# Altium PCB STM32_BluePill.PcbDoc (part 1 of 2)
Units mm, origin at the board's own origin, x right, y up, seen from the top; angles counter-clockwise.
Board outline 53 x 23 mm, 2 copper layers (Top Layer, Bottom Layer), stack 1.569 mm thick; 35 components, 50 nets, 176 pads, 44 vias.
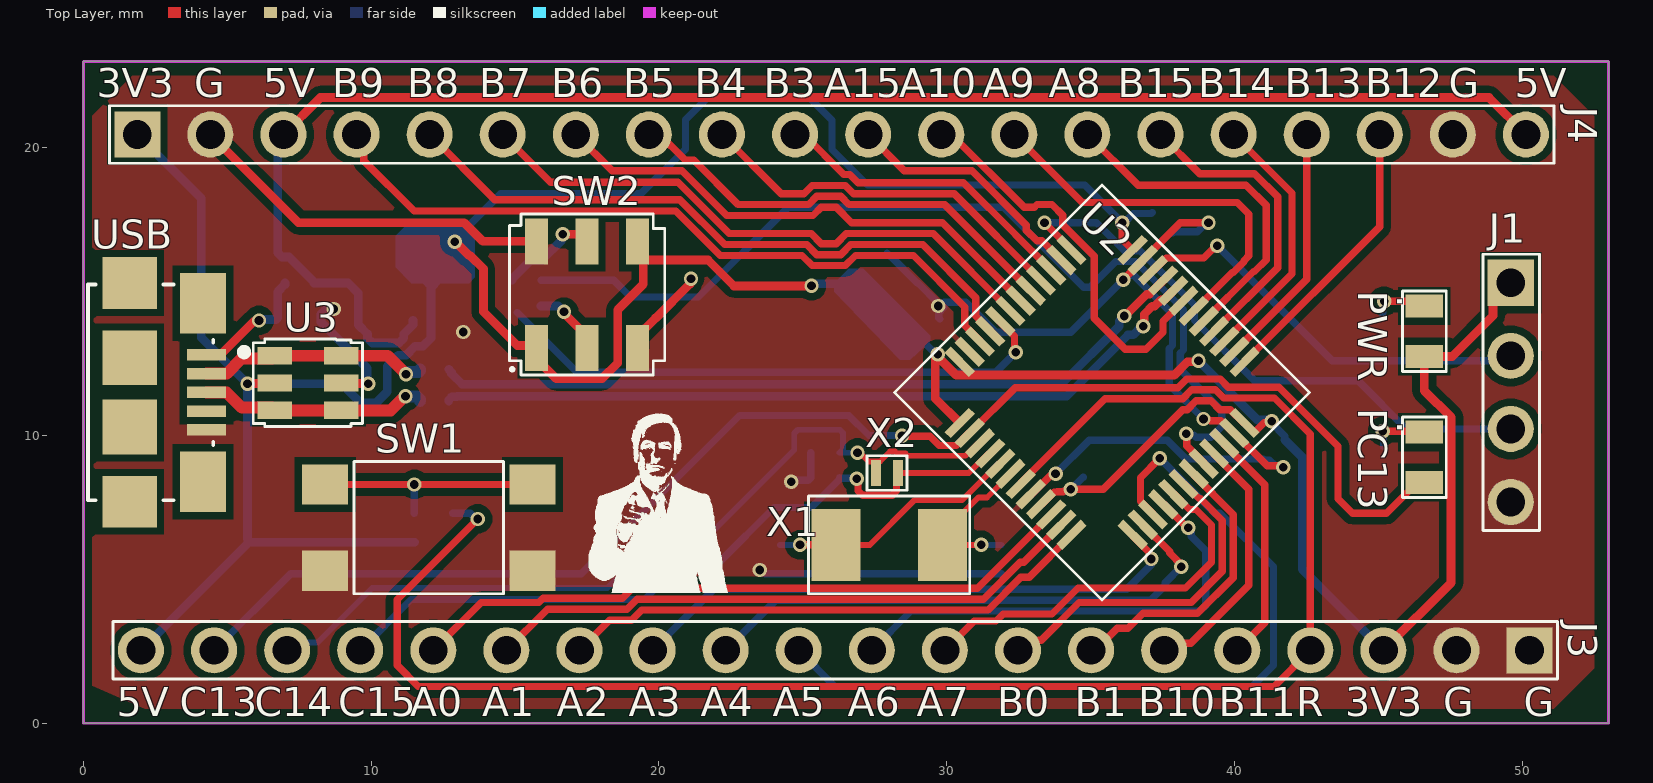
[diagram p0: Top Layer view]
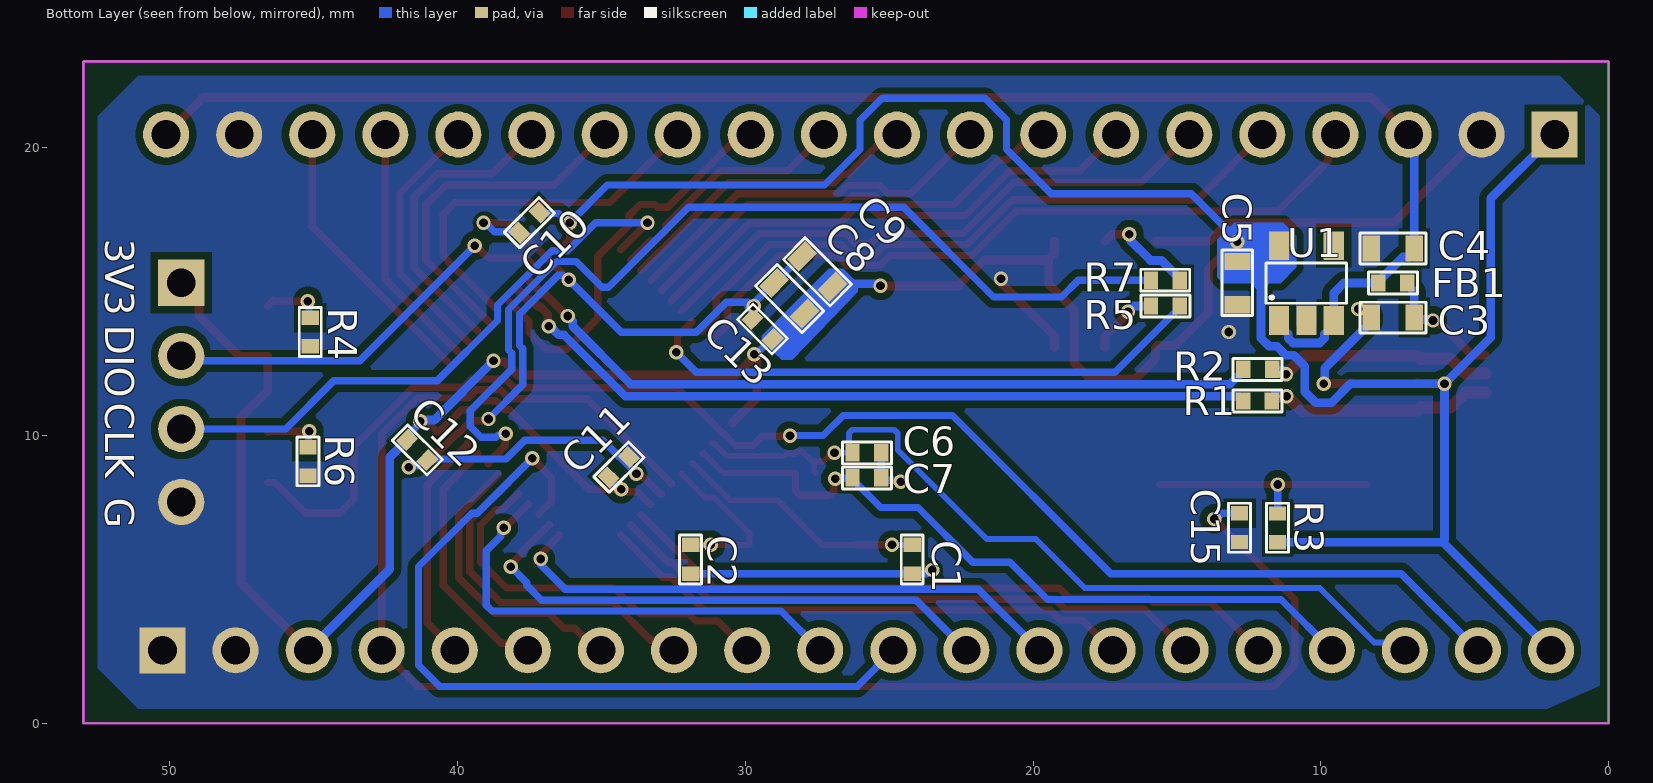
[diagram p1: Bottom Layer view, seen from below]
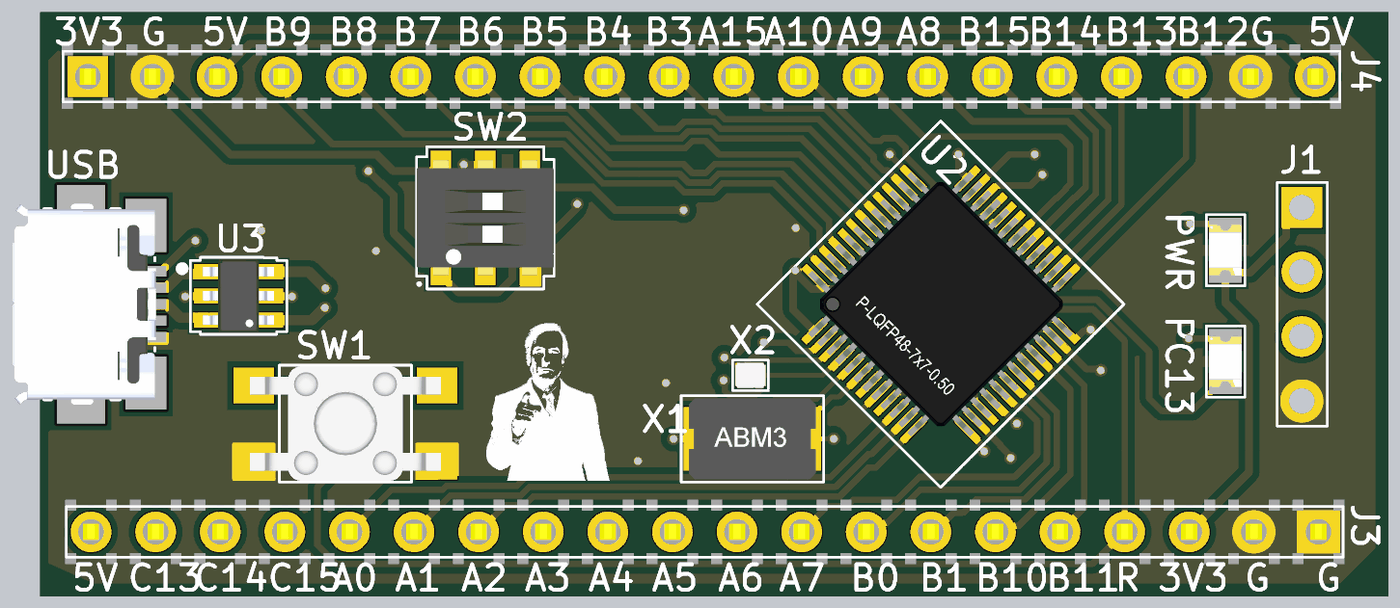
[diagram p2: 3D render of the assembled board from above, using the file's embedded part models]
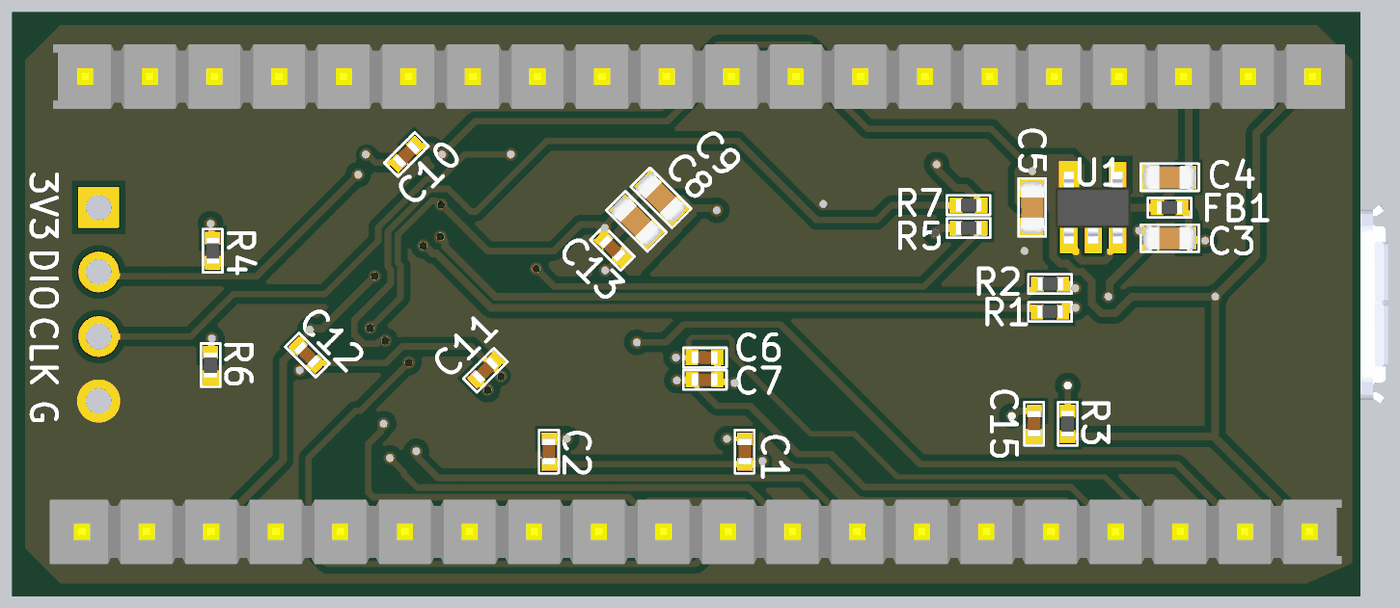
[diagram p3: 3D render of the assembled board from below, using the file's embedded part models]

## Layer stack, top to bottom
Top Solder: solder mask 0.0254, SM-001, Dk 4
Top Layer: signal copper 0.035
Dielectric 1: core 1.4986, Core-043, Dk 4.3
Bottom Layer: signal copper 0.035
Bottom Solder: solder mask 0.0254, SM-001, Dk 4

## Board outline
0,0 53,0 53,23 0,23

## Design rules (kind name [scope] priority, off if disabled: settings)
Clearance [All] p1: gap=0.254 ignorepadtopadclearanceinfootprint=FALSE except(0: Arc-Text Arc-Hole Track-Text Track-Hole SMDPad-Text SMDPad-Hole THPad-Text THPad-Hole Via-Text Via-Hole Fill-Text Fill-Hole Poly-Text Poly-Hole Region-Text Region-Hole Text-Text Text-Hole; 0.127: Arc-Arc Arc-Track Arc-SMDPad Track-Track Track-SMDPad SMDPad-SMDPad; 0.33: Arc-THPad Track-THPad SMDPad-THPad THPad-Via; 0.5: THPad-THPad)
DiffPairsRouting USB [InDifferentialPair('USB')] p1: maxlimit=0.152 minlimit=0.152 mostfreqgap=0.152 toplayer_minwidth=0.411 toplayer_maxwidth=0.411 toplayer_prefwidth=0.411 bottomlayer_minwidth=0.411 bottomlayer_maxwidth=0.411 bottomlayer_prefwidth=0.411 impedanceprofiledriven=TRUE impedanceprofileid={913DD1D4-14ED-41A0-9D1C-7E9C1710D32E} impedanceprofilevalue=90.000000 maxuncoupledlength=12.7
DiffPairsRouting MCU [InDifferentialPair('MCU')] p2: maxlimit=0.127 minlimit=0.127 mostfreqgap=0.127 toplayer_minwidth=0.3 toplayer_maxwidth=0.3 toplayer_prefwidth=0.3 bottomlayer_minwidth=0.3 bottomlayer_maxwidth=0.3 bottomlayer_prefwidth=0.3 impedanceprofiledriven=TRUE impedanceprofileid={99C51990-5D96-49DF-96CC-9B0603F21D91} impedanceprofilevalue=90.000000 maxuncoupledlength=12.7
HoleSize [All] p1: absolutevalues=TRUE maxlimit=6.3 minlimit=0.3 maxpercent=80.000 minpercent=20.000
PlaneConnect [All] p1: planeconnectstyle=Direct reliefexpansion=0.508 reliefentries=4 reliefconductorwidth=0.254 reliefairgap=0.254
PolygonConnect [All] p1: connectstyle=Direct reliefconductorwidth=0.254 reliefentries=4 polygonreliefangle="90 Angle" airgapwidth=0.254
RoutingCorners [All] p1: cornerstyle=45-Degree minsetback=1.27 maxsetback=1.27
RoutingVias [All] p1: holewidth=0.5 width=0.5 viastyle="Through Hole" minholewidth=0.3 minwidth=0.3 maxholewidth=2 maxwidth=2
SilkToSilkClearance [All] p1: silktosilkclearance=0.1
SilkToSolderMaskClearance [IsPad] p1: minsilkscreentomaskgap=0.1 clearancetoexposedcopper=TRUE
SolderMaskExpansion [All] p1: expansion=0.102 istentingtop=FALSE
UnRoutedNet [All] p1: checkbadconnections=TRUE
Width [All] p1: maxlimit=1.27 minlimit=0.127 preferedwidth=0.254 minimp=50.000000 maximp=50.000000 favimp=50.000000
23 further rules are at their usual default settings.

## Classes and differential pairs
differential pair USB: +USB_P -USB_N
differential pair MCU: +MCU_P -MCU_N

## Components (designator, comment, footprint, x,y, rotation, side; value= is the part's Value field where it differs from the comment)
C1 "22pF" "0402 CAP" 24.2,5.7 r90 bottom
C2 "22pF" "0402 CAP" 31.9,5.7 r90 bottom
C3 "4u7F" "0603 CAP" 7.5,14.1 r180 bottom value=4.7uF
C4 "1uF" "0603 CAP" 7.5,16.5 r180 bottom
C5 "1uF" "0603 CAP" 12.9,15.3 r90 bottom
C6 "10pF" "0402 CAP" 25.772,9.401 r0 bottom
C7 "10pF" "0402 CAP" 25.772,8.53 r0 bottom
C8 "4u7F" "0603 CAP" 28.47,14.77 r225 bottom value=4.7uF
C9 "1u" "0603 CAP" 27.5,15.7 r225 bottom value=1uF
C10 "100nF" "0402 CAP" 37.5,17.4 r135 bottom
C11 "100nF" "0402 CAP" 34.4,8.9 r315 bottom
C12 "100nF" "0402 CAP" 41.4,9.5 r45 bottom
C13 "100nF" "0402 CAP" 29.4,13.7 r225 bottom
C15 "0.1uF" "0402 CAP" 12.822,6.8 r90 bottom value=100nF
FB1 "120R" "0402 RES" 7.5,15.3 r0 bottom
J1 "Header 2.54MM 4POS 90D Male" "4pin 90degree header 2.54mm" 49.603,11.5 r270 top
J3 "Header 2.54MM 20POS Male" "20pin Male Header 2.54mm" 26.127,2.537 r180 top
J4 "Header 2.54MM 20POS Male" "20pin Male Header 2.54mm" 26,20.463 r0 top
PC13 "LED GREEN" "LED 0805" 46.6,9.242 r270 top (schematic designator D2)
PWR "LED RED" "LED 0805" 46.6,13.625 r270 top (schematic designator D1)
R1 "15R" "0402 RES" 12.2,11.2 r0 bottom
R2 "15R" "0402 RES" 12.191,12.3 r180 bottom
R3 "10k" "0402 RES" 11.5,6.791 r270 bottom value=10kR
R4 "1k" "0402 RES" 45.119,13.6 r270 bottom value=10kR
R5 "10k" "0402 RES" 15.4,14.5 r0 bottom value=10kR
R6 "1k" "0402 RES" 45.2,9.1 r270 bottom value=10kR
R7 "10k" "0402 RES" 15.4,15.4 r180 bottom value=10kR
SW1 "SWITCH TACTILE" "4 pin tactile switch" 12,6.8 r0 top
SW2 "2pin slide switch" CAS-D20TA 17.5,14.9 r0 top
U1 "AP2139AK-3.3TRG1" SOT-23-5 10.5,15.3 r180 bottom
U2 "STM32F103C6T6A" LQFP-48 35.4,11.5 r315 top locked
U3 "USBLC6-2SC6" SOT23-6 7.8,11.825 r90 top
USB "10118192-0001LF" 10118192-0001LF 4.28,11.5 r270 top locked (schematic designator J2)
X1 "8MHz" XR8M000000S416 28,6.2 r0 top
X2 "32.768kHz" ECX-1210 27.925,8.7 r180 top

## Footprints (in the part's own frame and the unit in brackets; to place one, negate y for a bottom-side part, rotate by r counter-clockwise, add the part's x,y. Pads: shape width x height; smd on the part's side, far side on the other; paste and mask are expansions set on the pad)
"4 pin tactile switch" [mm] "yatay düzlemdekiler iletimde 1ve2/3ve4"
  rect 1.6x1.4 smd paste-2539.97 mask+0.05: 1(-3.6,-1.5) 2(-3.6,1.5) 3(3.6,-1.5) 4(3.6,1.5)
  silkscreen extent -2.6,-2.3 2.6,2.3, body extent -3.75,-2.25 3.75,2.25, height 5
"4pin 90degree header 2.54mm" [mm] "4pin 90degree header 2.54mm"
  rect 1.6x1.6 hole 1 paste-2539.97 mask+0.05: 1(-3.81,0)
  round 1.6 hole 1 paste-2539.97 mask+0.05: 2(-1.27,0) 3(1.27,0) 4(3.81,0)
  silkscreen extent -4.8,-0.97 4.8,1, body extent -5.08,-1.27 5.08,6.12, height 5.01
"20pin Male Header 2.54mm" [mm] "20pin Male Header 2.54mm"
  rect 1.6x1.6 hole 1 paste-2539.97 mask+0.05: 1(-24.13,0)
  round 1.6 hole 1 paste-2539.97 mask+0.05: 2(-21.59,0) 3(-19.05,0) 4(-16.51,0) 5(-13.97,0) 6(-11.43,0) 7(-8.89,0) 8(-6.35,0) 9(-3.81,0) 10(-1.27,0) 11(1.27,0) 12(3.81,0) 13(6.35,0) 14(8.89,0) 15(11.43,0) 16(13.97,0) 17(16.51,0) 18(19.05,0) 19(21.59,0) 20(24.13,0)
  silkscreen extent -25.1,-1 25.1,1, body extent -25.4,-1.27 25.53,1.27, height 2.54
"0402 CAP" [mm]
  rect 0.5x0.6 smd paste-2539.97 mask+0.05: 1(-0.5,0) 2(0.5,0)
  silkscreen extent -0.86,-0.38 0.85,0.38, body extent -0.51,-0.26 0.51,0.26, height 0.61
"0402 RES" [mm]
  rect 0.5x0.6 smd paste-2539.97 mask+0.05: 1(-0.5,0) 2(0.5,0)
  silkscreen extent -0.86,-0.38 0.85,0.38, body extent -0.5,-0.25 0.5,0.25, height 0.35
"0603 CAP" [mm]
  rect 0.6x0.9 smd paste-2539.97 mask+0.05: 1(-0.75,0) 2(0.75,0)
  silkscreen extent -1.13,-0.53 1.16,0.53, body extent -1.05,-0.52 1.05,0.51, height 0.8
10118192-0001LF [mm] "10118192-0001LF Micro b usb connector smd"
  rect 0.4x1.35 smd: 1(-1.3,0) 2(-0.65,0) 3(0,0) 4(0.65,0) 5(1.3,0)
  rect 1.8x1.9 smd: 6(-3.8,-2.675) 6(3.8,-2.675)
  rect 2.1x1.6 smd: 6(-3.1,-0.125) 6(3.1,-0.125)
  rect 1.9x1.9 smd: 6(-1.2,-2.675) 6(1.2,-2.675)
  silkscreen extent -3.75,-4.13 3.75,1.4, body extent -3.96,-5.4 3.96,0.27, height 2.5
CAS-D20TA [mm]
  rect 0.8x1.6 smd paste-2539.97 mask+0.05: 1(-1.75,-1.85) 2(0,-1.85) 3(1.75,-1.85) 4(1.75,1.85) 5(0,1.85) 6(-1.75,1.85)
  silkscreen extent -2.7,-2.8 2.7,2.8, body extent -2.7,-2.27 2.7,2.27, height 2.5
ECX-1210 [mm]
  rect 0.35x0.89 smd paste-2539.97 mask+0.05: 1(-0.375,0) 2(0.375,0)
  silkscreen extent -0.7,-0.6 0.7,0.6, body extent -0.6,-0.5 0.6,0.5, height 0.35
"LED 0805" [mm]
  rect 0.8x1.3 smd mask+0.05: 1(-0.875,0) 2(0.875,0)
  silkscreen extent -1.4,-0.75 1.4,0.76, body extent -1,-0.65 1,0.65, height 0.8
LQFP-48 [mm]
  rect 0.3x1.2 smd paste-2539.97 mask+0.05: 1(-2.75,-4.25) 2(-2.25,-4.25) 3(-1.75,-4.25) 4(-1.25,-4.25) 5(-0.75,-4.25) 6(-0.25,-4.25) 7(0.25,-4.25) 8(0.75,-4.25) 9(1.25,-4.25) 10(1.75,-4.25) 11(2.25,-4.25) 12(2.75,-4.25) 25(2.75,4.25) 26(2.25,4.25) 27(1.75,4.25) 28(1.25,4.25) 29(0.75,4.25) 30(0.25,4.25) 31(-0.25,4.25) 32(-0.75,4.25) 33(-1.25,4.25) 34(-1.75,4.25) 35(-2.25,4.25) 36(-2.75,4.25)
  rect 1.2x0.3 smd paste-2539.97 mask+0.05: 13(4.25,-2.75) 14(4.25,-2.25) 15(4.25,-1.75) 16(4.25,-1.25) 17(4.25,-0.75) 18(4.25,-0.25) 19(4.25,0.25) 20(4.25,0.75) 21(4.25,1.25) 22(4.25,1.75) 23(4.25,2.25) 24(4.25,2.75) 37(-4.25,2.75) 38(-4.25,2.25) 39(-4.25,1.75) 40(-4.25,1.25) 41(-4.25,0.75) 42(-4.25,0.25) 43(-4.25,-0.25) 44(-4.25,-0.75) 45(-4.25,-1.25) 46(-4.25,-1.75) 47(-4.25,-2.25) 48(-4.25,-2.75)
  silkscreen extent -5.1,-5.1 5.1,5.1, body extent -4.5,-4.5 4.5,4.5, height 1.4
SOT23-6 [mm] "SOT23-6"
  rect 0.6x1.2 smd paste-2539.97 mask+0.05: 1(-0.95,-1.15) 2(0,-1.15) 3(0.95,-1.15) 4(0.95,1.15) 5(0,1.15) 6(-0.95,1.15)
  silkscreen extent -1.51,-1.9 1.53,1.9, body extent -1.45,-1.4 1.45,1.4, height 1.45
SOT-23-5 [mm]
  rect 0.7x1 smd paste-2539.97 mask+0.05: 1(-0.95,-1.3) 2(0,-1.3) 3(0.95,-1.3) 4(0.95,1.3) 5(-0.95,1.3)
  silkscreen extent -1.4,-0.7 1.4,0.7, body extent -1.48,-1.41 1.48,1.41, height 1.45
XR8M000000S416 [mm] "step yazısı hariç doğru"
  rect 1.7x2.5 smd paste-2539.97 mask+0.05: 1(-1.85,0) 2(1.85,0)
  silkscreen extent -2.8,-1.7 2.8,1.7, body extent -2.5,-1.6 2.5,1.6, height 1.3

## Part data
C1 C2: library part "0402 22p CAP", "Ceramic Capacitor, Multilayer, Ceramic, 50V, 5% +Tol, 5% -Tol, C0G, 30ppm/Cel TC, 0.000022uF, Surface Mount, 0402", Capacitor Type=Ceramic, Case=0402, Manufacturer=Murata, Manufacturer Part Number=GRM1555C1H220JA01D, Max Operating Temperature=125°C, Min Operating Temperature=-55°C, Package Shape=Rectangular, Package Style=SMTMeter, Rated DC Voltage (URdc)=50V, Supplier Part Number=490-5868-1-ND, Temperature Characteristics Code=C0G, Tolerance  (fill in as +-)=5%, Case/Package=0402, Category="Ceramic Capacitors", ComponentLink1Description=https://datasheet.ciiva.com:443/pdfs/VipMasterIC/IC/MURE/MURE-S-A0008911154/MURE-S-A0008911207-1.pdf?src-supplier=IHS+Markit, ComponentLink1URL=https://datasheet.ciiva.com:443/pdfs/VipMasterIC/IC/MURE/MURE-S-A0008911154/MURE-S-A0008911207-1.pdf?src-supplier=IHS+Markit, ComponentLink2Description=https://datasheet.ciiva.com/6277/product-6277809.pdf?src-supplier=Digikey, ComponentLink2URL=https://datasheet.ciiva.com/6277/product-6277809.pdf?src-supplier=Digikey, ComponentLink3Description=https://datasheet.ciiva.com/29200/453714-da-01-en-vs-kondensator-0402-29200051.pdf?src-supplier=Conrad, ComponentLink3URL=https://datasheet.ciiva.com/29200/453714-da-01-en-vs-kondensator-0402-29200051.pdf?src-supplier=Conrad, ComponentLink4Description=https://datasheet.ciiva.com/7828/1666664-7828846.pdf?src-supplier=Element14, ComponentLink4URL=https://datasheet.ciiva.com/7828/1666664-7828846.pdf?src-supplier=Element14, Dielectric Material=Ceramic, Height=0.5mm, JESD-609 Code=e3, Length=1mm, Mounting Technology="Surface Mount", Multilayer=Yes, Packaging="Tape and Reel", Pins=2, Pricing="1=0,1, 10=0,029, 50=0,0166, 100=0,0129, 500=0,00974, 1000=0,00765, 2500=0,00695, 5000=0,0064 (USD)", Reach SVHC Compliant=Yes, RoHS=Yes, RoHS Compliant=Yes, Stock=1670141, Supplier=Digikey, Terminal Finish=Nickel, Termination=Wraparound, Tolerance (fill in as +-)=5%, Width=0.5mm
C3 C8: library part "0603 4u7 CAP", "Ceramic Capacitor, Multilayer, Ceramic, 25V, 10% +Tol, 10% -Tol, X5R, 15% TC, 4.7uF, Surface Mount, 0603", Capacitor Type=Ceramic, Case=0603, Manufacturer=Samsung, Manufacturer Part Number=CL10A475KA8NQNC, Max Operating Temperature=85°C, Min Operating Temperature=-55°C, Package Shape=Rectangular, Package Style=SMTMeter, Rated DC Voltage (URdc)=25V, Supplier Part Number=1276-1900-1-ND, Temperature Characteristics Code=X5R, Tolerance  (fill in as +-)=10%, Case/Package=0603, Category="Ceramic Capacitors", ComponentLink1Description=https://datasheet.ciiva.com:443/pdfs/VipMasterIC/IC/SEMS/SEMS-S-A0008384515/SEMS-S-A0008873295-1.pdf?src-supplier=IHS+Markit, ComponentLink1URL=https://datasheet.ciiva.com:443/pdfs/VipMasterIC/IC/SEMS/SEMS-S-A0008384515/SEMS-S-A0008873295-1.pdf?src-supplier=IHS+Markit, ComponentLink2Description=https://datasheet.ciiva.com/25787/cl10a475ka8nqnc-25787017.pdf?src-supplier=Digikey, ComponentLink2URL=https://datasheet.ciiva.com/25787/cl10a475ka8nqnc-25787017.pdf?src-supplier=Digikey, Dielectric Material=Ceramic, Height=0.95mm, JESD-609 Code=e3, Length=1.6mm, Mounting Technology="Surface Mount", Multilayer=Yes, Packaging="Tape and Reel", Pins=2, Pricing="1=0,35, 10=0,226, 50=0,1584, 100=0,1279, 500=0,09502, 1000=0,08314 (USD)", Reach SVHC Compliant=Yes, RoHS=Yes, RoHS Compliant=Yes, Stock=1806164, Supplier=Digikey, Terminal Finish=Nickel, Termination=Wraparound, Tolerance (fill in as +-)=10%, Width=0.8mm
C4 C5 C9: library part "0603 1u CAP", "Ceramic Capacitor, Multilayer, Ceramic, 25V, 10% +Tol, 10% -Tol, X7R, 15% TC, 1uF, Surface Mount, 0603", Capacitor Type=Ceramic, Case=0603, Manufacturer=Murata, Manufacturer Part Number=GCM188R71E105KA64D, Max Operating Temperature=125°C, Min Operating Temperature=-55°C, Package Shape=Rectangular, Package Style=SMTMeter, Rated DC Voltage (URdc)=25V, Supplier Part Number=490-10673-6-ND, Temperature Characteristics Code=X7R, Tolerance  (fill in as +-)=10%, Case/Package=0603, Category="Ceramic Capacitors", ComponentLink1Description=https://datasheet.ciiva.com:443/pdfs/VipMasterIC/IC/MURE/MURE-S-A0004362469/MURE-S-A0004362812-1.pdf?src-supplier=IHS+Markit, ComponentLink1URL=https://datasheet.ciiva.com:443/pdfs/VipMasterIC/IC/MURE/MURE-S-A0004362469/MURE-S-A0004362812-1.pdf?src-supplier=IHS+Markit, ComponentLink2Description=https://datasheet.ciiva.com/11616/product-11616499.pdf?src-supplier=Avnet, ComponentLink2URL=https://datasheet.ciiva.com/11616/product-11616499.pdf?src-supplier=Avnet, ComponentLink3Description=https://datasheet.ciiva.com/26843/getdatasheetpartid-562446-26843671.pdf?src-supplier=Verical, ComponentLink3URL=https://datasheet.ciiva.com/26843/getdatasheetpartid-562446-26843671.pdf?src-supplier=Verical, Dielectric Material=Ceramic, Height=0.9mm, JESD-609 Code=e3, Length=1.6mm, Mounting Technology="Surface Mount", Multilayer=Yes, Packaging="Tape and Reel", Pins=2, Pricing="1=0,24, 10=0,158, 50=0,1, 100=0,08, 500=0,05776, 1000=0,0511 (USD)", Reach SVHC Compliant=Yes, Reference Standard=AEC-Q200, RoHS=Yes, RoHS Compliant=Yes, Stock=2612025, Supplier=Digikey, Terminal Finish=Nickel, Termination=Wraparound, Tolerance (fill in as +-)=10%, Width=0.8mm
C6 C7: library part "0402 10p CAP", "Ceramic Capacitor, Multilayer, Ceramic, 25V, 2% +Tol, 2% -Tol, C0G, 30ppm/Cel TC, 0.00001uF, Surface Mount, 01005", Capacitor Type=Ceramic, Case=0402, Manufacturer=Murata, Manufacturer Part Number=GRM0225C1E100GA03L, Max Operating Temperature=125°C, Min Operating Temperature=-55°C, Package Shape=Rectangular, Rated DC Voltage (URdc)=25V, Supplier Part Number=490-13464-2-ND, Temperature Characteristics Code=C0G, Tolerance  (fill in as +-)=2%, Category="Ceramic Capacitors", ComponentLink1Description=https://datasheet.ciiva.com:443/pdfs/VipMasterIC/IC/MURE/MURE-S-A0004430058/MURE-S-A0004435504-1.pdf?src-supplier=IHS+Markit, ComponentLink1URL=https://datasheet.ciiva.com:443/pdfs/VipMasterIC/IC/MURE/MURE-S-A0004430058/MURE-S-A0004435504-1.pdf?src-supplier=IHS+Markit, ComponentLink2Description=https://search.murata.co.jp/Ceramy/image/img/A01X/G101/ENG/GRM0225C1E100GA03-01.pdf?src-supplier=Digikey, ComponentLink2URL=https://search.murata.co.jp/Ceramy/image/img/A01X/G101/ENG/GRM0225C1E100GA03-01.pdf?src-supplier=Digikey, ComponentLink3Description=http://search.murata.co.jp/Ceramy/image/img/A01X/G101/ENG/GRM0225C1E100GA03-01.pdf?src-supplier=Digikey, ComponentLink3URL=http://search.murata.co.jp/Ceramy/image/img/A01X/G101/ENG/GRM0225C1E100GA03-01.pdf?src-supplier=Digikey, Dielectric Material=Ceramic, Mounting Technology="Surface Mount", Multilayer=Yes, Packaging="Tape and Reel", Pins=2, Pricing="40000=0,00724, 80000=0,00648, 120000=0,00524, 200000=0,00507, 280000=0,00476 (USD)", Reach SVHC Compliant=Yes, RoHS=Yes, RoHS Compliant=Yes, Stock=400000, Supplier=Digikey, Termination=Wraparound, Tolerance (fill in as +-)=2%
C10 C11 C12 C13 C15: library part "0402 100n AP", "Ceramic Capacitor, Multilayer, Ceramic, 25V, 10% +Tol, 10% -Tol, X7R, 15% TC, 0.1uF, Surface Mount, 0402", Capacitor Type=Ceramic, Case=0402, Manufacturer=Murata, Manufacturer Part Number=GRM155R71E104KE14J, Max Operating Temperature=125°C, Min Operating Temperature=-55°C, Package Shape=Rectangular, Package Style=SMTMeter, Rated DC Voltage (URdc)=25V, Supplier Part Number=490-14603-1-ND, Temperature Characteristics Code=X7R, Tolerance  (fill in as +-)=10%, Case/Package=0402, Category="Ceramic Capacitors", ComponentLink1Description=https://datasheet.ciiva.com:443/pdfs/VipMasterIC/IC/MURE/MURE-S-A0004362469/MURE-S-A0004364872-1.pdf?src-supplier=IHS+Markit, ComponentLink1URL=https://datasheet.ciiva.com:443/pdfs/VipMasterIC/IC/MURE/MURE-S-A0004362469/MURE-S-A0004364872-1.pdf?src-supplier=IHS+Markit, ComponentLink2Description=http://www.mouser.com/ds/2/281/c02e-2905.pdf?src-supplier=Mouser, ComponentLink2URL=http://www.mouser.com/ds/2/281/c02e-2905.pdf?src-supplier=Mouser, ComponentLink3Description=https://datasheet.octopart.com/GRM155R71E104KE14J-Murata-datasheet-155345056.pdf?src-supplier=Element14, ComponentLink3URL=https://datasheet.octopart.com/GRM155R71E104KE14J-Murata-datasheet-155345056.pdf?src-supplier=Element14, ComponentLink4Description=http://search.murata.co.jp/Ceramy/image/img/A01X/G101/ENG/GRM155R71E104KE14-01.pdf?src-supplier=Digikey, ComponentLink4URL=http://search.murata.co.jp/Ceramy/image/img/A01X/G101/ENG/GRM155R71E104KE14-01.pdf?src-supplier=Digikey, ComponentLink5Description=https://datasheet.octopart.com/GRM155R71E104KE14J-Murata-datasheet-165579666.pdf?src-supplier=TME, ComponentLink5URL=https://datasheet.octopart.com/GRM155R71E104KE14J-Murata-datasheet-165579666.pdf?src-supplier=TME, Dielectric Material=Ceramic, Height=0.5mm, JESD-609 Code=e3, Length=1mm, Mounting Technology="Surface Mount", Multilayer=Yes, Packaging="Tape and Reel", Pins=2, Pricing="1=0,1, 10=0,024, 50=0,0136, 100=0,0105, 500=0,00794, 1000=0,00623, 2500=0,00566, 5000=0,00521 (USD)", Reach SVHC Compliant=Yes, RoHS=Yes, RoHS Compliant=Yes, Stock=3911559, Supplier=Digikey, Terminal Finish=Nickel, Termination=Wraparound, Tolerance (fill in as +-)=10%, Width=0.5mm
FB1: library part "Ferritte Bead 120R 0402", "Ferrite Chip, 1 Function(s), 0.9A, 2 Pin(s) / BLM15PD121SN1D", Case Code=0402, Clock Frequency=100MHz, Current Rating=900mA, DC Resistance-Max=90mR, Manufacturer=Murata, Manufacturer Part Number=BLM15PD121SN1D, Max Operating Temperature=125°C, Min Operating Temperature=-55°C, Supplier Part Number=490-5203-6-ND, Category="Ferrite Beads and Chips", Channels=1, ComponentLink1Description=https://datasheet.ciiva.com:443/pdfs/VipMasterIC/IC/MURE/MURE-S-A0010009827/MURE-S-A0010009827-1.pdf?src-supplier=IHS+Markit, ComponentLink1URL=https://datasheet.ciiva.com:443/pdfs/VipMasterIC/IC/MURE/MURE-S-A0010009827/MURE-S-A0010009827-1.pdf?src-supplier=IHS+Markit, Construction="Chip Bead", Filter Type="FERRITE CHIP", Height=0.5mm, JESD-609 Code=e3, Length=1mm, Material=Ferrite, Min Frequency=100MHz, Mounting Technology="Surface Mount", Output Impedance=120R, Packaging="Tape and Reel", Pricing="1=0,1, 10=0,068, 25=0,0616, 50=0,0556, 100=0,0408, 250=0,02968, 500=0,0272, 1000=0,02348, 5000=0,01854 (USD)", Reach SVHC Compliant=Yes, RoHS=Yes, RoHS Compliant=Yes, Stock=709858, Supplier=Digikey, Terminal Finish=Nickel, Width=0.5mm
PC13: library part "LED GREEN 0805"
PWR: library part "LED RED 0805"
R1 R2: library part "0402 15R RES", "Fixed Resistor, Metal Glaze/thick Film, 0.0625W, 15ohm, 50V, 1% +/-Tol, 100ppm/Cel, Surface Mount, 0402", Case=0402, Manufacturer=Yageo, Manufacturer Part Number=RC0402FR-0715RL, Max Operating Temperature=155°C, Min Operating Temperature=-55°C, Package Height=0.35mm, Package Length=1mm, Package Shape=Rectangular, Package Style=SMTMeter, Package Width=0.5mm, Power=62.5mW, Rated Temperature=70°C, Resistor Type="FIXED RESISTOR", Supplier Part Number=311-15LRCT-ND, Temperature Coefficient=100ppm/°C, Tolerance=1%, Working Voltage=50V, Additional Feature="LASER TRIMMABLE", Case/Package=0402, Category="Chip SMD Resistors", ComponentLink1Description=https://datasheet.ciiva.com:443/pdfs/VipMasterIC/IC/YAGO/YAGO-S-A0008145938/YAGO-S-A0008145938-1.pdf?src-supplier=IHS+Markit, ComponentLink1URL=https://datasheet.ciiva.com:443/pdfs/VipMasterIC/IC/YAGO/YAGO-S-A0008145938/YAGO-S-A0008145938-1.pdf?src-supplier=IHS+Markit, ComponentLink2Description=https://datasheet.ciiva.com/2518/pyu-r-int-thick-7-2518950.pdf?src-supplier=Digikey, ComponentLink2URL=https://datasheet.ciiva.com/2518/pyu-r-int-thick-7-2518950.pdf?src-supplier=Digikey, ComponentLink3Description=https://datasheet.ciiva.com/2518/pyu-r-int-thick-7-2518951.pdf?src-supplier=Digikey, ComponentLink3URL=https://datasheet.ciiva.com/2518/pyu-r-int-thick-7-2518951.pdf?src-supplier=Digikey, ComponentLink4Description=https://datasheet.ciiva.com/2518/pyu-r-int-thick-7-2518949.pdf?src-supplier=Digikey, ComponentLink4URL=https://datasheet.ciiva.com/2518/pyu-r-int-thick-7-2518949.pdf?src-supplier=Digikey, ComponentLink5Description=https://datasheet.ciiva.com/12558/pyu-rc0402-51-rohs-l-6-r-8721-12558367.pdf?src-supplier=Mouser, ComponentLink5URL=https://datasheet.ciiva.com/12558/pyu-rc0402-51-rohs-l-6-r-8721-12558367.pdf?src-supplier=Mouser, ComponentLink6Description=https://datasheet.ciiva.com/16740/pyu-rc0402-51-rohs-l-6-r-16740598.pdf?src-supplier=Future+Electronics, ComponentLink6URL=https://datasheet.ciiva.com/16740/pyu-rc0402-51-rohs-l-6-r-16740598.pdf?src-supplier=Future+Electronics, Construction=Chip, JESD-609 Code=e3, Mounting Technology="Surface Mount", Packaging="Tape and Reel", Pins=2, Pricing="1=0,1, 10=0,015, 50=0,0088, 100=0,0073, 500=0,00488, 1000=0,00417, 5000=0,00297 (USD)", Reach SVHC Compliant=Yes, RoHS=Yes, RoHS Compliant=Yes, Stock=374901, Supplier=Digikey, Technology="METAL GLAZE/THICK FILM", Terminal Finish=Nickel, Termination=Wraparound
R3 R5 R7: library part "0402 10k RES", "Fixed Resistor, Metal Glaze/thick Film, 0.06W, 10000ohm, 50V, 1% +/-Tol, 100ppm/Cel, Surface Mount, 0402", Case=0402, Manufacturer=Samsung, Manufacturer Part Number=RC1005F103CS, Max Operating Temperature=125°C, Min Operating Temperature=-55°C, Package Height=0.35mm, Package Length=1mm, Package Shape=Rectangular, Package Style=SMTMeter, Package Width=0.5mm, Power=60mW, Resistor Type="FIXED RESISTOR", Supplier Part Number=1276-3431-1-ND, Temperature Coefficient=100ppm/°C, Tolerance=1%, Working Voltage=50V, Case/Package=0402, Category="Chip SMD Resistors", ComponentLink1Description=https://datasheet.ciiva.com:443/pdfs/VipMasterIC/IC/SEMS/SEMS-S-A0001326806/SEMS-S-A0001326806-1.pdf?src-supplier=IHS+Markit, ComponentLink1URL=https://datasheet.ciiva.com:443/pdfs/VipMasterIC/IC/SEMS/SEMS-S-A0001326806/SEMS-S-A0001326806-1.pdf?src-supplier=IHS+Markit, ComponentLink2Description=https://datasheet.ciiva.com/15196/getdatasheetpartid-504789-15196214.pdf?src-supplier=Verical, ComponentLink2URL=https://datasheet.ciiva.com/15196/getdatasheetpartid-504789-15196214.pdf?src-supplier=Verical, ComponentLink3Description=https://datasheet.ciiva.com/16481/rcseries-16481007.pdf?src-supplier=Future+Electronics, ComponentLink3URL=https://datasheet.ciiva.com/16481/rcseries-16481007.pdf?src-supplier=Future+Electronics, Construction=Chip, JESD-609 Code=e3, Mounting Technology="Surface Mount", Packaging="Tape and Reel", Pins=2, Pricing="1=0,1, 10=0,024, 50=0,0156, 100=0,0132, 500=0,00922, 1000=0,00803, 5000=0,00598 (USD)", Reach SVHC Compliant=Yes, RoHS=Yes, RoHS Compliant=Yes, Stock=45634757, Supplier=Digikey, Technology="METAL GLAZE/THICK FILM", Terminal Finish=Nickel
R4 R6: library part "0402 1k RES", "Fixed Resistor, Metal Glaze/thick Film, 0.06W, 10000ohm, 50V, 1% +/-Tol, 100ppm/Cel, Surface Mount, 0402", Case=0402, Manufacturer=Samsung, Manufacturer Part Number=RC1005F103CS, Max Operating Temperature=125°C, Min Operating Temperature=-55°C, Package Height=0.35mm, Package Length=1mm, Package Shape=Rectangular, Package Style=SMTMeter, Package Width=0.5mm, Power=60mW, Resistor Type="FIXED RESISTOR", Supplier Part Number=1276-3431-1-ND, Temperature Coefficient=100ppm/°C, Tolerance=1%, Working Voltage=50V, Case/Package=0402, Category="Chip SMD Resistors", ComponentLink1Description=https://datasheet.ciiva.com:443/pdfs/VipMasterIC/IC/SEMS/SEMS-S-A0001326806/SEMS-S-A0001326806-1.pdf?src-supplier=IHS+Markit, ComponentLink1URL=https://datasheet.ciiva.com:443/pdfs/VipMasterIC/IC/SEMS/SEMS-S-A0001326806/SEMS-S-A0001326806-1.pdf?src-supplier=IHS+Markit, ComponentLink2Description=https://datasheet.ciiva.com/15196/getdatasheetpartid-504789-15196214.pdf?src-supplier=Verical, ComponentLink2URL=https://datasheet.ciiva.com/15196/getdatasheetpartid-504789-15196214.pdf?src-supplier=Verical, ComponentLink3Description=https://datasheet.ciiva.com/16481/rcseries-16481007.pdf?src-supplier=Future+Electronics, ComponentLink3URL=https://datasheet.ciiva.com/16481/rcseries-16481007.pdf?src-supplier=Future+Electronics, Construction=Chip, JESD-609 Code=e3, Mounting Technology="Surface Mount", Packaging="Tape and Reel", Pins=2, Pricing="1=0,1, 10=0,024, 50=0,0156, 100=0,0132, 500=0,00922, 1000=0,00803, 5000=0,00598 (USD)", Reach SVHC Compliant=Yes, RoHS=Yes, RoHS Compliant=Yes, Stock=45634757, Supplier=Digikey, Technology="METAL GLAZE/THICK FILM", Terminal Finish=Nickel
SW1: "TL3305BF260QG Keypad Switch, 1 Switches, SPST, Momentary, 0.05A, 12VDC, 3.04N, Solder Terminal, Surface Mount-straight", Contact Current(DC)-Max=50mA, Contact DC Max Rating R Load=.05A@12VDC, Contact Voltage(DC)-Max=12V, Manufacturer=E-Switch, Manufacturer Part Number=TL3305BF260QG, Max Operating Temperature=70°C, Min Operating Temperature=-20°C, Operating Force-Max=3.04N, Supplier Part Number=EG5354CT-ND, Body Breadth=4.5inch, Body Height=4.9mm, Body Length or Diameter=4.5mm, Category="Tactile Switches", Circuit Configuration=1X1, ComponentLink1Description=https://datasheet.ciiva.com:443/pdfs/VipMasterIC/IC/ESCH/ESCH-S-A0003149373/ESCH-S-A0003149373-1.pdf?src-supplier=IHS+Markit, ComponentLink1URL=https://datasheet.ciiva.com:443/pdfs/VipMasterIC/IC/ESCH/ESCH-S-A0003149373/ESCH-S-A0003149373-1.pdf?src-supplier=IHS+Markit, ComponentLink2Description=http://www.farnell.com/datasheets/2554191.pdf?src-supplier=Farnell, ComponentLink2URL=http://www.farnell.com/datasheets/2554191.pdf?src-supplier=Farnell, ComponentLink3Description=https://sten-eswitch-13110800-production.s3.amazonaws.com/system/asset/product_line/data_sheet/213/TL3305.pdf?src-supplier=Digikey, ComponentLink3URL=https://sten-eswitch-13110800-production.s3.amazonaws.com/system/asset/product_line/data_sheet/213/TL3305.pdf?src-supplier=Digikey, ComponentLink4Description=http://spec_sheets.e-switch.com/specs/P010472.pdf?src-supplier=Digikey, ComponentLink4URL=http://spec_sheets.e-switch.com/specs/P010472.pdf?src-supplier=Digikey, ComponentLink5Description=https://datasheet.octopart.com/TL3305BF260QG-E-Switch-datasheet-100437264.pdf?src-supplier=Element14, ComponentLink5URL=https://datasheet.octopart.com/TL3305BF260QG-E-Switch-datasheet-100437264.pdf?src-supplier=Element14, ComponentLink6Description=https://datasheet.octopart.com/TL3305BF260QG-E-Switch-datasheet-62330036.pdf?src-supplier=Future+Electronics, ComponentLink6URL=https://datasheet.octopart.com/TL3305BF260QG-E-Switch-datasheet-62330036.pdf?src-supplier=Future+Electronics, ComponentLink7Description=http://www.farnell.com/datasheets/2554191.pdf?src-supplier=Newark, ComponentLink7URL=http://www.farnell.com/datasheets/2554191.pdf?src-supplier=Newark, Electrical Life=200000Cycles, Mounting Technology="Surface Mount", Number of Switches=1, Packaging="Tape and Reel", Pricing="1=0,22, 10=0,214, 25=0,2028, 100=0,1836, 250=0,16736, 500=0,15558 (USD)", Reach SVHC Compliant=Yes, RoHS=Yes, RoHS Compliant=Yes, Stock=306451, Supplier=Digikey, Switch Action=MOMENTARY, Switch Function=SPST, Switch Type=Keypad, Termination=Solder
SW2: "SWITCH SLIDE SPDTX2 100MA 6V", Manufacturer="Nidec Copal", Manufacturer Part Number=CAS-D20TA, Max Operating Temperature=85°C, Max Voltage Rating (DC)=24V, Min Operating Temperature=-40°C, Operating Force=510gf, Supplier Part Number=CASD20JCT-ND, Voltage Rating (DC)=6V, Actuator Material=Nylon,Polyamide, Category="DIP Switches", ComponentLink1Description=https://datasheet.ciiva.com/2865/cas-2865269.pdf?src-supplier=Digikey, ComponentLink1URL=https://datasheet.ciiva.com/2865/cas-2865269.pdf?src-supplier=Digikey, ComponentLink2Description=https://datasheet.ciiva.com/2865/cas-2865270.pdf?src-supplier=Digikey, ComponentLink2URL=https://datasheet.ciiva.com/2865/cas-2865270.pdf?src-supplier=Digikey, ComponentLink3Description=https://datasheet.ciiva.com/2865/cas-2865268.pdf?src-supplier=Digikey, ComponentLink3URL=https://datasheet.ciiva.com/2865/cas-2865268.pdf?src-supplier=Digikey, Contact Material="Copper Alloy", Contact Plating=Gold, Electrical Life=2000Cycles, Lead Free="Contains Lead", Mounting Technology="Surface Mount", Orientation=Vertical, Packaging="Cut Tape", Pricing="1=2,42, 10=2,356, 25=2,1428, 100=1,8616, 250=1,68712, 500=1,57076 (USD)", RoHS=Yes, RoHS Compliant=Yes, Series=CAS, Stock=42269, Supplier=Digikey, Switch Function=On-On, Switch Travel=0.6mm, Termination=J-Hook, Throw Configuration=SPDT,DPDT
U1: "Fixed Positive LDO Regulator, 3.3V, 0.3V Dropout, CMOS, PDSO5", Case/Package=LSSOP, Dropout Voltage1-Max=300mV, Manufacturer=Diodes, Max Supply Voltage=6.6V, Min Input Voltage=2.5V, Operating Temperature, TJ-Max=85°C, Operating Temperature, TJ-Min=-40°C, Output Current1-Max=100mA, Output Voltage1-Max=3.366V, Output Voltage1-Min=3.234V, Output Voltage1-Nom=3.3V, Package Body Material=Plastic, Package Shape=Rectangular, Package Style="SMALL OUTLINE, LOW PROFILE, SHRINK PITCHMeter", Supplier Part Number=AP2139AK-3.3TRG1DICT-ND, Category="Voltage Regulators - Linear", Channels=1, ComponentLink1Description=https://datasheet.ciiva.com:443/pdfs/VipMasterIC/IC/DIOD/DIOD-S-A0008668704/DIOD-S-A0008668704-1.pdf?src-supplier=IHS+Markit, ComponentLink1URL=https://datasheet.ciiva.com:443/pdfs/VipMasterIC/IC/DIOD/DIOD-S-A0008668704/DIOD-S-A0008668704-1.pdf?src-supplier=IHS+Markit, ComponentLink2Description=https://datasheet.ciiva.com/29569/ap2138-9-29569029.pdf?src-supplier=Digikey, ComponentLink2URL=https://datasheet.ciiva.com/29569/ap2138-9-29569029.pdf?src-supplier=Digikey, ComponentLink3Description=https://datasheet.ciiva.com/29569/ap2138-9-29569030.pdf?src-supplier=Digikey, ComponentLink3URL=https://datasheet.ciiva.com/29569/ap2138-9-29569030.pdf?src-supplier=Digikey, ComponentLink4Description=https://datasheet.ciiva.com/30016/ap2138-9-30016781.pdf?src-supplier=Avnet, ComponentLink4URL=https://datasheet.ciiva.com/30016/ap2138-9-30016781.pdf?src-supplier=Avnet, Height - Seated (Max)=1.45mm, JESD-30 Code=R-PDSO-G5, JESD-609 Code=e3, Length=2.92mm, Manufacturer Part Number=AP2139AK-3.3TRG1, Moisture Sensitivity Level=3, Pins=5, Pricing="1=0,4, 10=0,323, 25=0,2956, 100=0,2201, 250=0,19948, 500=0,16508, 1000=0,12381 (USD)", Reach SVHC Compliant=Yes, Regulator Type="FIXED POSITIVE SINGLE OUTPUT LDO REGULATOR", RoHS=Yes, RoHS Compliant=Yes, Stock=268160, Supplier=Digikey, Surface Mount=Yes, Technology=CMOS, Terminal Finish=Tin, Terminal Form="Gull Wing", Terminal Pitch=0.95mm, Terminal Position=DUAL, Width=1.6mm
U2: "MCU 32-bit STM32F ARM Cortex M3 RISC 32KB Flash 2.5V/3.3V 48-Pin LQFP Tray", Case/Package=LQFP, Clock Frequency=72MHz, Manufacturer=STMicroelectronics, Max Operating Temperature=85°C, Max Supply Voltage=3.6V, Min Operating Temperature=-40°C, Min Supply Voltage=2V, Package Quantity=1500, Supplier Part Number=497-11515-ND, Category=Microcontrollers, ComponentLink1Description=https://datasheet.ciiva.com/15122/getdatasheetpartid-69879-15122075.pdf?src-supplier=Verical, ComponentLink1URL=https://datasheet.ciiva.com/15122/getdatasheetpartid-69879-15122075.pdf?src-supplier=Verical, ComponentLink2Description=https://datasheet.ciiva.com/14100/pustm-arm-microcont-stm32f103-en-14100507.pdf?src-supplier=Distrelec, ComponentLink2URL=https://datasheet.ciiva.com/14100/pustm-arm-microcont-stm32f103-en-14100507.pdf?src-supplier=Distrelec, Core Architecture=ARM, Data Bus Width=32b, Designed by="Mert Ali Şentürk", Height=1.4mm, Lead Free="Lead Free", Length=7mm, Manufacturer Part Number=STM32F103C6T6A, Memory Format=FLASH, Memory Size=32KB, Number of ADC Channels=10, Number of Timers/Counters=3, Number of I/Os=37, Packaging=Tray, Pins=48, Pricing="1=6,37, 10=5,723, 25=5,4104, 80=4,689, 250=4,44852, 500=3,99166, 1000=3,36645, 2500=3,19813 (USD)", RAM Size=10KB, RoHS=Yes, RoHS Compliant=Yes, Series=STM32F103C6, Stock=178, Supplier=Digi-Key, Weight=0.006409oz, Width=7mm, Interface=I2C,SPI,USART
U3: library part "USB Protection", "Trans Voltage Suppressor Diode, 5V V(RWM), Unidirectional, 1 Element, Silicon", Clamping Voltage-Max=17V, Manufacturer=STMicroelectronics, Max Operating Temperature=125°C, Min Breakdown Voltage=6V, Min Operating Temperature=-40°C, Package Body Material=Plastic, Package Shape=Rectangular, Package Style="SMALL OUTLINEMeter", Peak Reflow Temperature (Cel)=260°C, Rep Pk Reverse Voltage-Max=5V, Supplier Part Number=497-5235-1-ND, Additional Feature="HIGH RELIABILITY", Category="TVS Diodes", ComponentLink1Description=https://datasheet.ciiva.com:443/pdfs/VipMasterIC/IC/SGST/SGSTS30336/SGSTS30336-1.pdf?src-supplier=IHS+Markit, ComponentLink1URL=https://datasheet.ciiva.com:443/pdfs/VipMasterIC/IC/SGST/SGSTS30336/SGSTS30336-1.pdf?src-supplier=IHS+Markit, ComponentLink2Description=https://datasheet.ciiva.com/1268/1690354-1268384.pdf?src-supplier=Element14, ComponentLink2URL=https://datasheet.ciiva.com/1268/1690354-1268384.pdf?src-supplier=Element14, ComponentLink3Description=https://datasheet.ciiva.com/4508/cd00050750-113117-4508433.pdf?src-supplier=Mouser, ComponentLink3URL=https://datasheet.ciiva.com/4508/cd00050750-113117-4508433.pdf?src-supplier=Mouser, ComponentLink4Description=https://datasheet.ciiva.com/15143/getdatasheetpartid-148465-15143789.pdf?src-supplier=Verical, ComponentLink4URL=https://datasheet.ciiva.com/15143/getdatasheetpartid-148465-15143789.pdf?src-supplier=Verical, ComponentLink5Description=https://datasheet.ciiva.com/16200/cd00050750-16200026.pdf?src-supplier=Future+Electronics, ComponentLink5URL=https://datasheet.ciiva.com/16200/cd00050750-16200026.pdf?src-supplier=Future+Electronics, ComponentLink6Description=https://datasheet.ciiva.com/41444/001184109-da-01-en-ic-esd-protecti-usblc6-2sc6-sot-23-6-stm-41444156.pdf?src-supplier=Conrad, ComponentLink6URL=https://datasheet.ciiva.com/41444/001184109-da-01-en-ic-esd-protecti-usblc6-2sc6-sot-23-6-stm-41444156.pdf?src-supplier=Conrad, Diode Element Material=SILICON, Diode Type="TRANS VOLTAGE SUPPRESSOR", JESD-30 Code=R-PDSO-G6, JESD-609 Code=e3, Manufacturer Part Number=USBLC6-2SC6, Moisture Sensitivity Level=1, Number of Elements=1, Pins=6, Polarity=Unidirectional, Pricing="1=0,58, 10=0,496, 100=0,3448, 500=0,2692, 1000=0,21881 (USD)", Qualification Status="Not Qualified", Reach SVHC Compliant=Yes, Reference Standard=IEC-61000-4-2, RoHS=Yes, RoHS Compliant=Yes, Stock=59063, Supplier=Digikey, Surface Mount=Yes, Technology=AVALANCHE, Terminal Finish=Tin, Terminal Form="Gull Wing", Terminal Position=DUAL
USB: library part "micro b usb connector", "CONN USB MICRO B RECPT SMT R/A", Manufacturer="Amphenol ICC / FCI", Supplier Part Number=609-4613-1-ND, Category=Uncategorized, Manufacturer Part Number=10118192-0001LF, Pricing="1=0,46, 10=0,404, 25=0,3696, 50=0,3478, 100=0,3334, 250=0,30436, 500=0,28988 (USD)", RoHS=No, Stock=76957, Supplier=Digikey
X1: library part XR8M000000S416, "8 MHz ±30ppm Crystal 16pF 80 Ohms 2-SMD, No Lead", Equivalent Series Resistance="80 ohm", Frequency="8M Hz", Frequency Tolerance=30ppm, Load Capacitance=16pF, Operating Temperature="-40°C ~ 85°C"
X2: library part "ECS-.327-7-1210-TR ECX-1210", "Parallel - Fundamental Quartz Crystal, 32.768KHz Nom 7pF ECX-1210", Frequency Stability=0.0144%, Frequency Tolerance=20ppm, Load Capacitance=7pF, Manufacturer="ECS International", Manufacturer Part Number=ECS-.327-7-1210-TR, Max Operating Temperature=85°C, Min Operating Temperature=-40°C, Operating Frequency-Nom=0.032768, Supplier Part Number=XC2284CT-ND, Aging="3 PPM/FIRST YEAR", Category="Crystals and Oscillators", ComponentLink1Description=https://datasheet.ciiva.com:443/pdfs/VipMasterIC/IC/ECSI/ECSI-S-A0009254912/ECSI-S-A0009254912-1.pdf?src-supplier=IHS+Markit, ComponentLink1URL=https://datasheet.ciiva.com:443/pdfs/VipMasterIC/IC/ECSI/ECSI-S-A0009254912/ECSI-S-A0009254912-1.pdf?src-supplier=IHS+Markit, ComponentLink2Description=https://www.ecsxtal.com/store/pdf/ECX-1210.pdf?src-supplier=Digikey, ComponentLink2URL=https://www.ecsxtal.com/store/pdf/ECX-1210.pdf?src-supplier=Digikey, ComponentLink3Description=https://datasheet.octopart.com/ECS-.327-7-1210-TR-ECS-International-datasheet-127110274.pdf?src-supplier=Future+Electronics, ComponentLink3URL=https://datasheet.octopart.com/ECS-.327-7-1210-TR-ECS-International-datasheet-127110274.pdf?src-supplier=Future+Electronics, ComponentLink4Description=https://datasheet.octopart.com/ECS-.327-7-1210-TR-ECS-International-datasheet-101965301.pdf?src-supplier=Master+Electronics, ComponentLink4URL=https://datasheet.octopart.com/ECS-.327-7-1210-TR-ECS-International-datasheet-101965301.pdf?src-supplier=Master+Electronics, Crystal/Resonator Type="PARALLEL - FUNDAMENTAL", Drive Level=0.1uW, ESR=90kR, Mounting Technology="Surface Mount", Pricing="1=0,87, 10=0,828, 50=0,8088, 100=0,6932, 500=0,67804 (USD)", Reach SVHC Compliant=Yes, RoHS=Yes, RoHS Compliant=Yes, Stock=129744, Supplier=Digikey

## Via types
v1: diameter 0.5, hole 0.3, Top Layer to Bottom Layer, tented both sides, 44 vias

## Nets (pads, with @x,y where several pads share a name; then routed paths per layer and width w, separated by ;. In a path a pad name is that pad's centre, name@x,y a point inside that pad or via, vN(x,y) a via of type N, cw(c..) or ccw(c..) an arc to the next point about the centre after c; other vN are vias at no path point)
3V3: C5.2 C8.2 C9.2 C10.2 C11.2 C12.2 C13.2 J1.1 J3.3 J3.20 J4.1 PWR.2 R3.2 SW2.1 SW2.4 U1.5 U2.1 U2.9 U2.24 U2.36 U2.48 U3.5 | length 145.8
  Top Layer w0.254: U2.9 33.311,7.611 33.739,8.039 33.842,8.039 33.845,8.042 34.047,8.042 34.094,8.089 34.268,8.089 v1(34.315,8.136) 35.443,8.136 38.208,10.9 38.357,10.9 38.663,11.206 39.186,11.206 39.492,10.9 39.857,10.9 40.317,10.439 U2.24 40.668,10.121 40.7,10.121 41.032,10.453 41.253,10.453 v1(41.3,10.5) ; v1(36.1,17.4) 36.1,16.81 U2.36
  Top Layer w0.305: v1(5.7,11.8) 5.713,11.813 6.637,11.813 U3.5 ; v1(12.9,16.741) 12.917,16.741 13.409,16.25 13.446,16.25 13.9,15.796 13.9,14.3 15.071,13.129 15.671,13.129 SW2.1 15.75,12.65 16.429,11.971 18.016,11.971 18.567,12.522 18.567,14.367 19.456,15.256 19.456,16.102 SW2.4@19.498,16.102 ; SW2.4 19.25,16.35 SW2.4@19.498,16.102 ; v1(25.3,15.2) 22.609,15.2 21.706,16.102 SW2.4@19.498,16.102 ; v1@29.67,12.761 30.331,12.1 37.904,12.1 38.366,12.562 38.712,12.562 v1(38.75,12.599) ; v1(29.687,12.831) 29.687,12.778 29.6,12.691 29.6,11.29 U2.1 ; J3.3 47.529,4.89 47.529,10.633 46.6,11.562 PWR.2 47.572,12.75 48.988,14.166 48.988,14.695 J1.1
  Bottom Layer w0.254: U1.5 12.2,16.6 12.75,16.05 C5.2 ; v1(12.9,16.741) 12.9,16.8 14.501,18.401 19.366,18.401 20.92,19.955 20.92,20.97 21.669,21.72 25.251,21.72 26.013,20.957 26.013,19.942 27.247,18.707 34.793,18.707 v1(36.1,17.4) 36.167,17.4 36.485,17.718 37.111,17.718 C10.2 ; C13.2 29.109,13.346 29.625,12.831 v1(29.687,12.831) ; v1(34.315,8.136) 34.329,8.136 34.74,8.546 C11.2 ; v1(41.3,10.5) 41.3,10.433 41.754,9.98 C12.2
  Bottom Layer w0.305: J4.1 4.09,18.242 4.09,13.41 v1(5.7,11.8) ; J3.20 5.7,6.24 ; R3.2 5.809,6.291 5.7,6.4 v1(5.7,11.8) ; 12.2,16.6 12.079,16.479 12.079,13.384 11.795,13.1 11.522,13.1 11.211,12.789 10.938,12.789 10.554,12.404 10.554,12.075 10.556,12.072 10.556,11.528 10.172,11.144 9.628,11.144 8.972,11.8 v1(5.7,11.8) ; v1(25.3,15.2) 25.376,15.276 26.864,15.276 C9.2 ; v1(38.75,12.599) 40.812,10.537 41.263,10.537 v1(41.3,10.5) ; C12.2 42.356,9.251 42.356,5.358 J3.3
5V: C4.2 FB1.2 J4.3 J4.20 U1.1 U1.3 | length 55.7
  Top Layer w0.305: J4.3 8.232,21.745 48.848,21.745 J4.20
  Bottom Layer w0.305: J4.3 6.75,20.263 C4.2 6.75,16.35 6.898,16.202 7.148,16.202 8,15.35 FB1.2 9.2,15.3 9.55,14.95 U1.3 9.55,13.85 9.871,13.529 9.871,13.384 10.034,13.221 10.966,13.221 11.129,13.384 11.129,13.529 11.45,13.85 U1.1
BOOT0: R5.1 U2.44 | length 19.8
  Top Layer w0.254: U2.44 31.864,13.942 32.353,13.454 32.353,12.947 v1(32.4,12.9)
  Bottom Layer w0.254: R5.1@15.075,14.275 17.15,12.2 31.7,12.2 v1(32.4,12.9)
BOOT1: R7.1 U2.20 | length 33.5
  Top Layer w0.254: v1(38.331,10.069) 38.347,10.053 38.347,9.646 38.936,9.058 U2.20
  Bottom Layer w0.254: R7.1 18.427,15.4 19.012,14.815 21.374,14.815 24.49,17.931 31.977,17.931 34.754,15.154 34.765,15.154 34.767,15.151 34.977,15.151 35.872,16.046 36.561,16.046 38.229,14.378 38.229,12.971 38.119,12.861 38.119,12.306 39.556,10.869 39.556,10.314 39.186,9.944 38.663,9.944 38.586,10.022 38.378,10.022 v1(38.331,10.069)
GND: C1.1 C2.1 C3.1 C4.1 C5.1 C6.1 C7.1 C8.1 C9.1 C10.1 C11.1 C12.1 C13.1 C15.1 J1.4 J3.1 J3.2 J4.2 J4.19 R4.2 R6.2 SW1.1 SW1.3 SW2.3 SW2.6 U1.2 U2.8 U2.23 U2.35 U2.47 U3.2 USB.5 | length 67
  Top Layer w0.254: U2.8 32.958,7.964 33.616,8.623 33.736,8.623 v1(33.783,8.67) ; v1(36.134,15.415) U2.35 38.118,17.4 v1(39.1,17.4) ; v1(38.925,10.575) 38.972,10.528 39.146,10.528 39.157,10.517 39.533,10.517 39.964,10.086 U2.23 41.135,8.947 41.653,8.947 v1(41.7,8.9)
  Top Layer w0.305: J4.2 7.475,17.398 12.569,17.398 13.231,17.398 13.878,16.75 SW2.6 ; U3.2 8.963,11.813 9.887,11.813 v1(9.9,11.8) ; SW2.3 19.25,13.45 19.882,14.082 19.891,14.082 v1@21.075,15.266 ; v1(21.112,15.446) v1@21.154,15.446
  Bottom Layer w0.254: v1(23.5,5.327) 23.567,5.327 23.694,5.2 C1.1 C2.1 ; v1(24.6,8.4) 24.647,8.447 25.189,8.447 C7.1 C6.1 ; C9.1@27.924,16.336 C9.1 28.05,16.23 28.98,15.3 C8.1 29.718,14.582 C13.1@29.718,14.089 ; v1(29.704,14.504) v1@29.904,14.504 ; v1(33.783,8.67) 34.952,9.839 37.669,9.839 38.326,9.182 41.011,9.182 C12.1 41.22,9.146 41.42,8.947 41.653,8.947 v1(41.7,8.9) ; C10.1 37.889,17.082 38.715,17.082 39.033,17.4 v1(39.1,17.4) ; v1(38.925,10.575) 37.738,11.762 37.738,13.019 37.848,13.129 37.848,14.22 36.499,15.57 36.355,15.57 36.2,15.415 v1(36.134,15.415) 34.312,13.594 31.706,13.594 30.662,14.638 29.904,14.638 v1@29.904,14.504 ; C13.1@29.718,14.089 29.718,14.263 29.904,14.448 v1@29.904,14.504 ; C13.1@29.718,14.089 C13.1 C13.1@29.718,14.089
  Bottom Layer w0.305: v1(8.696,14.4) 8.659,14.363 8.398,14.363 8.25,14.215 C3.1 8.25,13.95 9.863,12.337 9.863,11.837 v1(9.9,11.8)
  other v1: 13.2,13.6
HSE_IN: C1.2 U2.5 X1.1 | length 8.8
  Top Layer w0.203: X1.1 27.323,6.2 28.875,7.752 30.535,7.752 31.808,9.025 U2.5
  Top Layer w0.254: v1(24.9,6.2) X1.1
  Bottom Layer w0.203: C1.2 v1(24.9,6.2)
HSE_OUT: C2.2 U2.6 X1.2 | length 5.7
  Top Layer w0.203: v1(31.2,6.2) X1.2 29.85,6.6 31.101,7.851 31.397,7.851 U2.6
  Bottom Layer w0.203: v1(31.2,6.2) C2.2
LSE_IN: C6.2 J3.18 U2.3 X2.2 | length 29.4
  Top Layer w0.203: v1(26.9,9.4) 26.98,9.4 27.281,9.099 27.678,9.099 28.026,9.447 28.197,9.447 28.27,9.374 28.57,9.374 28.644,9.299 30.656,9.299 31.089,9.732 U2.3 ; X2.2 27.623,8.773 X2.2@27.623,9.099
  Bottom Layer w0.203: J3.18 7.344,2.805 8.143,2.805 10.038,4.7 18.2,4.7 19.9,6.4 21.6,6.4 24.7,9.5 24.7,10.081 24.819,10.2 26.281,10.2 26.4,10.081 26.4,9.529 C6.2 ; C6.2@26.273,9.401 v1@26.899,9.401
LSE_OUT: C7.2 J3.17 U2.4 X2.1 | length 25.8
  Top Layer w0.203: X2.1 30.764,8.7 31.442,9.379 U2.4
  Top Layer w0.254: v1(26.871,8.5) 26.918,8.453 26.918,8.082 27.072,7.928 28.103,7.928 28.252,8.077 28.252,8.652 X2.1
  Bottom Layer w0.254: J3.17 11.38,4.3 19.5,4.3 20.8,5.6 22.1,5.6 24,7.5 25.292,7.5 26.272,8.48 C7.2 26.287,8.515 26.856,8.515 v1(26.871,8.5)
MCU_N: R1.2 U2.32 | length 27
  Top Layer w0.3: v1(36.836,13.801) 36.87,13.835 36.87,14.221 37.138,14.489 37.226,14.489 37.454,14.717 37.557,14.717 U2.32
  Bottom Layer w0.3: R1.2 12.7,11.25 12.8,11.35 12.965,11.35 12.976,11.361 12.977,11.361 34.165,11.361 36.302,13.498 36.479,13.498 36.782,13.801 v1(36.836,13.801)
MCU_P: R2.1 U2.33 | length 26.7
  Top Layer w0.3: v1(36.17,14.153) 36.199,14.153 36.961,14.916 37.049,14.916 U2.33
  Bottom Layer w0.3: R2.1 12.791,12.2 12.791,12.15 13.153,11.788 33.988,11.788 36,13.8 36,13.977 36.17,14.147 v1(36.17,14.153)
NetD1_1: PWR.1 R4.1 | length 2.1
  Top Layer w0.254: v1(45.2,14.669) 46.369,14.669 46.4,14.7 PWR.1
  Bottom Layer w0.254: R4.1 45.16,14.141 45.16,14.629 v1(45.2,14.669)
NetD2_1: PC13.1 R6.1 | length 2
  Top Layer w0.254: v1(45.154,10.154) 46.563,10.154 PC13.1
  Bottom Layer w0.254: v1(45.154,10.154) 45.177,10.131 45.177,9.623 R6.1
NetR3_1: R3.1 SW1.2 SW1.4 | length 8.2
  Top Layer w0.254: SW1.2 v1(11.5,8.3) SW1.4
  Bottom Layer w0.254: R3.1 v1(11.5,8.3)
NetR5_2: R5.2 SW2.2 | length 2.5
  Top Layer w0.305: v1(16.7,14.3) 16.7,14.25 17.5,13.45 SW2.2
  Bottom Layer w0.305: R5.2 16.5,14.5 v1(16.7,14.3)
NetR7_2: R7.2 SW2.5 | length 3.5
  Top Layer w0.305: v1(16.654,17) 17.252,17 17.5,16.752 SW2.5
  Bottom Layer w0.305: R7.2 14.9,15.45 15.538,16.088 15.916,16.088 16.617,16.788 16.617,16.963 v1(16.654,17)
PA0: J3.16 U2.10 | length 23.4
  Top Layer w0.254: J3.16 13.82,4.2 15.821,4.2 15.967,4.346 18.73,4.346 19.08,4.696 31.071,4.696 U2.10
PA1: J3.15 U2.11 | length 21.1
  Top Layer w0.254: J3.15 16.125,3.965 18.888,3.965 19.238,4.315 31.276,4.315 32.561,5.6 32.682,5.6 U2.11
PA2: J3.14 U2.12 | length 18.8
  Top Layer w0.254: J3.14 18.284,3.584 19.046,3.584 19.396,3.934 31.434,3.934 32.575,5.075 32.864,5.075 U2.12
PA3: J3.13 U2.13 | length 19.9
  Top Layer w0.254: U2.13 36.461,6.518 37.067,5.912 37.067,5.759 v1(37.114,5.712)
  Bottom Layer w0.254: J3.13 21.902,4.662 36.262,4.662 37.114,5.514 v1(37.114,5.712)
PA4: J3.12 U2.14 | length 19.1
  Top Layer w0.254: U2.14 37.748,5.97 37.748,5.919 38.154,5.513 v1(38.154,5.446)
  Bottom Layer w0.254: J3.12 24.061,4.281 37.081,4.281 37.594,4.794 37.594,4.886 v1(38.154,5.446)
PA5: J3.11 U2.15 | length 28.7
  Top Layer w0.254: U2.15 37.168,7.29 36.737,7.721 36.737,8.537 v1(37.408,9.208)
  Bottom Layer w0.254: J3.11 26.114,1.28 40.618,1.28 41.354,2.017 41.354,5.446 39.497,7.303 39.312,7.303 v1(37.408,9.208)
PA6: J3.10 U2.16 | length 16.4
  Top Layer w0.254: U2.16 37.554,7.611 38.365,6.8 v1(38.4,6.8)
  Bottom Layer w0.254: J3.10 28.76,3.9 38.8,3.9 39,4.1 39,6 38.5,6.5 38.5,6.633 38.4,6.733 v1(38.4,6.8)
PA7: J3.9 U2.17 | length 13.6
  Top Layer w0.254: J3.9 30.953,3.553 31.715,3.553 31.962,3.8 33.661,3.8 34.561,4.7 38.3,4.7 39.2,5.6 39.2,6.892 38.661,7.431 38.441,7.431 37.907,7.964 U2.17
PA8: J4.14 U2.29 | length 12.2
  Top Layer w0.254: J4.14 36.653,18.7 40.4,18.7 41.1,18 41.1,16.1 40.7,15.7 40.661,15.7 U2.29
PA9: J4.13 U2.30 | length 13.5
  Top Layer w0.254: J4.13 34.713,18.1 40.1,18.1 40.5,17.7 40.5,16.246 40.331,16.077 40.331,16.039 39.961,15.669 39.923,15.669 U2.30
PA10: J4.12 U2.31 | length 14
  Top Layer w0.254: J4.12 30.158,20.463 32.69,17.931 33.039,17.931 33.139,18.031 33.661,18.031 34.031,17.661 34.031,17.329 35.124,16.237 35.124,14.076 36.2,13 36.928,13 37.52,13.592 37.52,13.973 U2.31
PA15: J4.11 U2.38 | length 8.6
  Top Layer w0.254: J4.11 28.527,19.206 30.876,19.206 32.769,17.313 32.769,17.139 33.139,16.769 33.313,16.769 U2.38
PB0: J3.8 U2.18 | length 11.9
  Top Layer w0.254: J3.8 32.841,2.537 33.192,2.888 33.288,2.888 34.6,4.2 38.5,4.2 39.581,5.281 39.581,7.05 38.819,7.812 38.767,7.812 38.261,8.318 U2.18
PB1: J3.7 U2.19 | length 10.2
  Top Layer w0.254: J3.7 35.162,2.537 35.925,3.3 36.3,3.3 36.819,3.819 38.719,3.819 39.962,5.062 39.962,7.259 38.582,8.639 U2.19
PB3: J4.10 U2.39 | length 10.9
  Top Layer w0.254: J4.10 25.037,20.463 26.426,19.074 26.635,19.074 26.92,18.789 30.586,18.789 32.388,16.987 32.388,16.981 32.981,16.388 32.987,16.388 U2.39
PB4: J4.9 U2.40 | length 13.4
  Top Layer w0.254: J4.9 24.245,18.408 25.038,18.408 25.323,18.693 26.477,18.693 26.762,18.408 30.26,18.408 U2.40
PB5: J4.8 U2.41 | length 15.8
  Top Layer w0.254: J4.8 20.014,20.463 20.409,20.067 20.417,20.067 20.911,19.574 21.213,19.574 22.76,18.027 25.196,18.027 25.481,18.312 26.319,18.312 26.604,18.027 29.934,18.027 U2.41
PB6: J4.7 U2.42 | length 18.1
  Top Layer w0.254: J4.7 18.373,19.2 20.8,19.2 22.354,17.646 25.353,17.646 25.639,17.931 26.161,17.931 26.692,17.4 29.854,17.4 U2.42
PB7: J4.6 U2.43 | length 20.5
  Top Layer w0.254: J4.6 16.233,18.8 20.661,18.8 22.442,17.019 25.289,17.019 25.639,16.669 26.161,16.669 26.511,17.019 29.527,17.019 U2.43
PB8: J4.5 U2.45 | length 23
  Top Layer w0.254: J4.5 14.293,18.2 20.722,18.2 22.284,16.638 25.131,16.638 25.481,16.288 26.319,16.288 26.669,16.638 29.162,16.638 31.012,14.788 31.012,14.153 31.511,13.654 U2.45
PB9: J4.4 U2.46 | length 25.7
  Top Layer w0.254: J4.4 9.745,20.208 9.745,19.555 11.496,17.804 20.58,17.804 22.127,16.257 24.973,16.257 25.323,15.907 26.477,15.907 26.827,16.257 28.843,16.257 30.631,14.469 30.631,13.827 31.157,13.3 U2.46
PB10: J3.6 U2.21 | length 9
  Top Layer w0.254: J3.6 37.798,2.778 38.478,2.778 40.5,4.8 40.5,8.135 39.289,9.346 U2.21
PB11: J3.5 U2.22 | length 8.2
  Top Layer w0.254: U2.22 39.643,9.7 41.053,8.289 41.053,3.494 J3.5
PB12: J4.18 U2.25 | length 9.8
  Top Layer w0.254: U2.25 45.05,17.261 J4.18
PB13: J4.17 U2.26 | length 8.6
  Top Layer w0.254: U2.26 42.51,15.428 J4.17
PB14: J4.16 U2.27 | length 9
  Top Layer w0.254: U2.27 42,15.625 42,18.433 J4.16
PB15: J4.15 U2.28 | length 10.6
  Top Layer w0.254: J4.15 38.793,19.1 40.7,19.1 41.5,18.3 41.5,15.832 U2.28